# Altium PCB ABLS-PCB-R01.PcbDoc
Units mm, origin at the board's own origin, x right, y up, seen from the top; angles counter-clockwise.
Board outline 6 x 6 mm, 2 copper layers (Top Layer, Bottom Layer), stack 1.571 mm thick; 9 components, 4 nets, 22 pads, 11 vias.
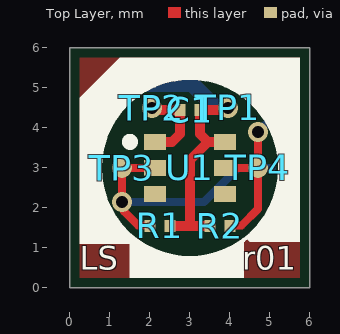
[diagram p0: Top Layer view]
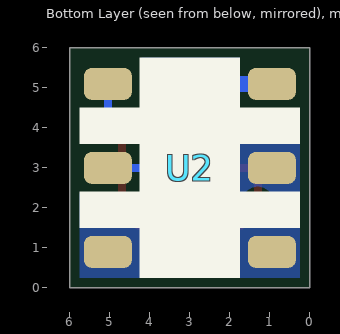
[diagram p1: Bottom Layer view, seen from below]
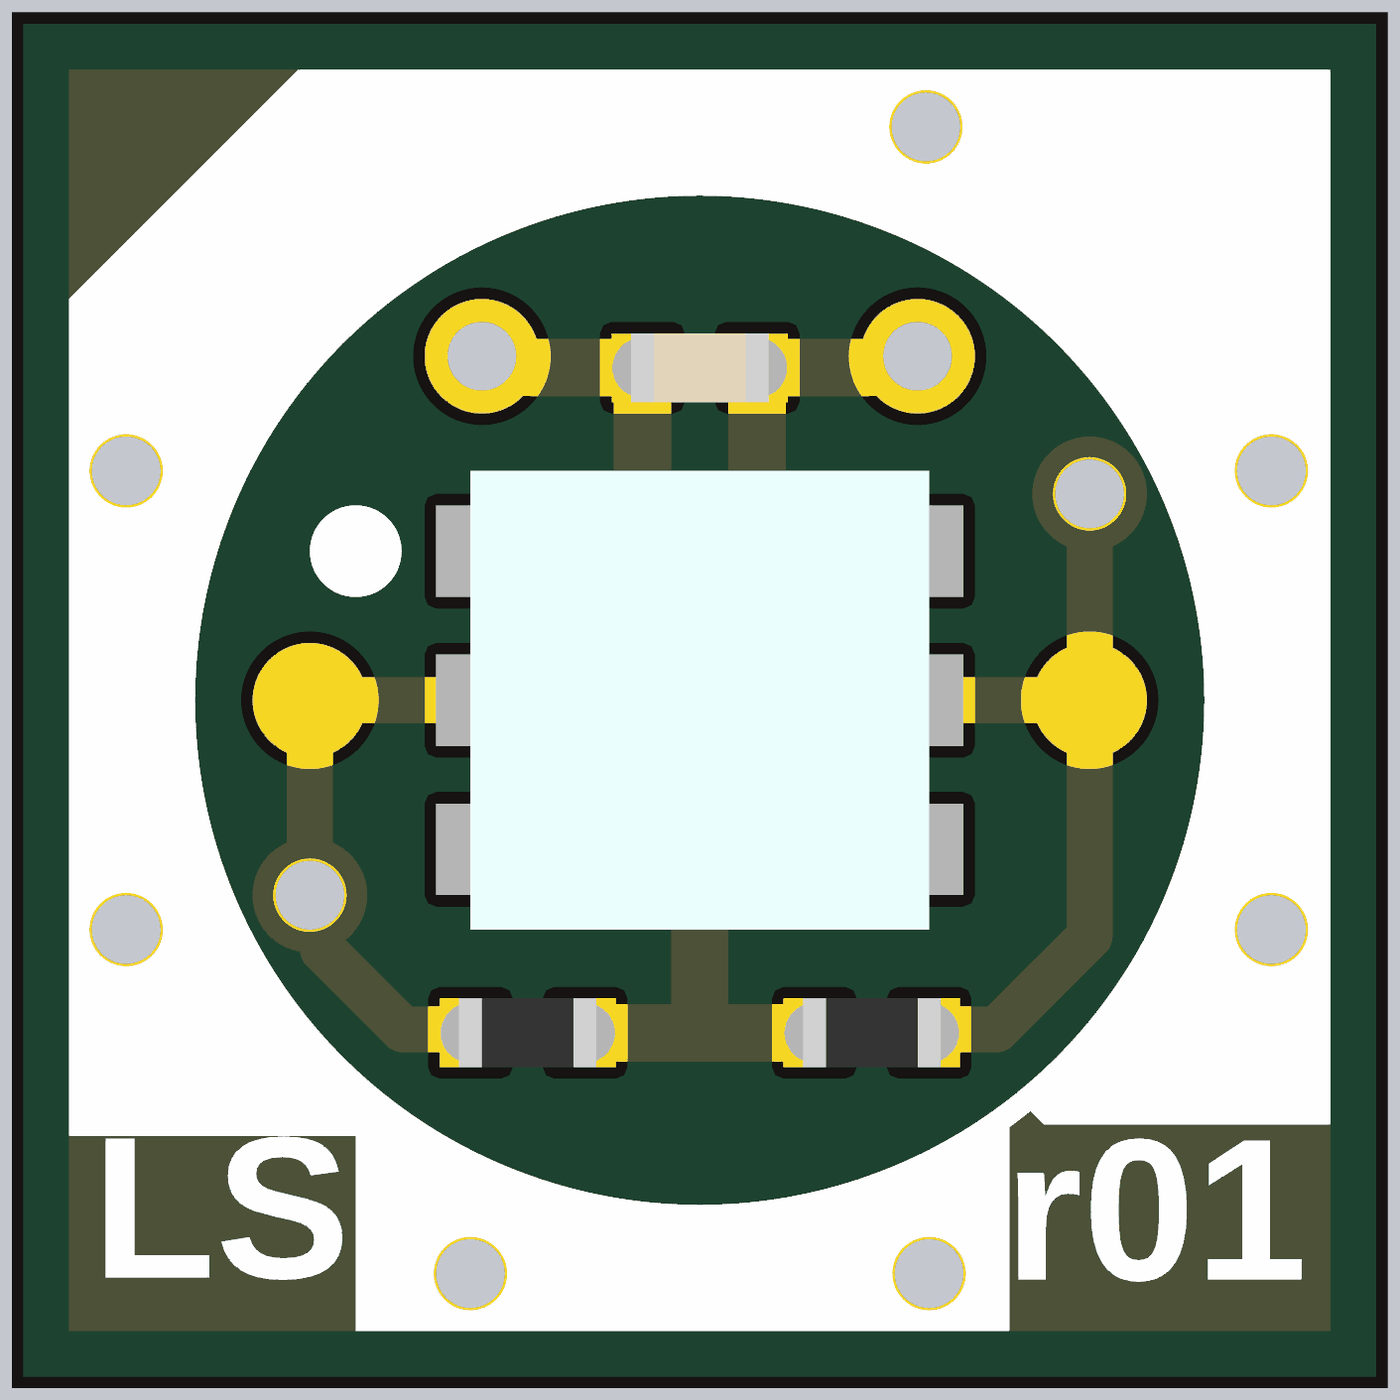
[diagram p2: 3D render of the assembled board from above, using the file's embedded part models]

## Layer stack, top to bottom
Top Solder: solder mask 0.0102, Solder Resist, Dk 3.5
Top Layer: signal copper 0.0356
Dielectric 1: dielectric 1.5, FR-4, Dk 4.8
Bottom Layer: signal copper 0.0356
Bottom Solder: solder mask 0.0102, Solder Resist, Dk 3.5

## Board outline
0,0 6,0 6,6 0,6

## Design rules (kind name [scope] priority, off if disabled: settings)
Clearance [All] p1: gap=0.13 ignorepadtopadclearanceinfootprint=FALSE
ComponentClearance ComponentClearance_TP [HasFootprint('TP_0.50mm')] p1: gap=0.1 collisioncheckmode=3 verticalgap=0.1 showdistances=FALSE
ComponentClearance [All] p2: gap=0.254 collisioncheckmode=3 verticalgap=0.254 showdistances=FALSE
PolygonConnect [All] p1: connectstyle=Direct reliefconductorwidth=0.254 reliefentries=4 polygonreliefangle="90 Angle" airgapwidth=0.254
RoomDefinition "Ambient Light Sensor" [InComponentClass('Ambient Light Sensor')] p1: confinementstyle=ConfineOut formatcopy=TRUE lockcomponents=FALSE outline 6.95,0.5 45.4,0.5 45.4,5.6 6.95,5.6
RoutingVias [All] p1: holewidth=0.3 width=0.5 viastyle="Through Hole" minholewidth=0.3 minwidth=0.5 maxholewidth=1 maxwidth=1.5
SilkToSilkClearance [All] p1: silktosilkclearance=0
SolderMaskExpansion [All] p1: expansion=0.05 istentingtop=FALSE
Width [All] p1: maxlimit=4 minlimit=0.1 preferedwidth=0.2
28 further rules are at their usual default settings.

## Classes and differential pairs
net class PWR: VCCA3.3

## Components (designator, comment, footprint, x,y, rotation, side; value= is the part's Value field where it differs from the comment)
C1 "470nF 10V" CAPC0603X03L 3,4.45 r180 top
R1 "2.1k 1%" RESC0603X03L 2.25,1.55 r0 top
R2 "2.1k 1%" RESC0603X03L 3.75,1.55 r180 top
TP1 "Testpoint 0.5mm" TP_0.50mm 3.95,4.5 r90 top
TP2 "Testpoint 0.5mm" TP_0.50mm 2.05,4.5 r90 top
TP3 "Testpoint 0.5mm" TP_0.50mm 1.3,3 r90 top
TP4 "Testpoint 0.5mm" TP_0.50mm 4.7,3 r90 top
U1 "VEML3235" "Light Sensor_VEML3235" 3,3 r0 top
U2 "Ambient Light Sensor Module" "ABLS-R01-sensor-Module Footprint" 3,3 r180 bottom

## Footprints (in the part's own frame and the unit in brackets; to place one, negate y for a bottom-side part, rotate by r counter-clockwise, add the part's x,y. Pads: shape width x height; smd on the part's side, far side on the other; paste and mask are expansions set on the pad)
"ABLS-R01-sensor-Module Footprint" [mm] "LGA Footprint for Solder On Ambient Light Sensor"
  rrect50% 1.2x0.8 smd: 1(2.05,2.1) 2(2.05,0) 3(2.05,-2.1) 4(-2.05,-2.1) 5(-2.05,0) 6(-2.05,2.1)
CAPC0603X03L [mm] "Chip Capacitor, 2-Leads, Body 0,60x0,30mm, IPC High Density"
  rect 0.27x0.3 smd paste-0.5: 1(-0.25,0) 2(0.25,0)
  body extent -0.3,-0.15 0.3,0.15, height 0.3
"Light Sensor_VEML3235" [mm] "Ambient light sensor VEML3235"
  rect 0.55x0.4 smd: 1(-0.875,0.65) 2(-0.875,0) 3(-0.875,-0.65) 4(0.875,-0.65) 5(0.875,0) 6(0.875,0.65)
  body extent -1,-1 1,1, height 0.87
RESC0603X03L [mm] "Chip Resistor, 2-Leads, Body 0,60x0,30mm, IPC High Density"
  rect 0.27x0.3 smd paste-0.5: 1(-0.25,0) 2(0.25,0)
  body extent -0.3,-0.15 0.3,0.15, height 0.26
TP_0.50mm [mm] "Testpoint 0.50mm diameter"
  round 0.5 smd paste-1: TP(0,0)

## Part data
C1: library part CAP_0201_470nF_10V, "Multilayer Ceramic Capacitors MLCC - SMD/SMT 0201 10VDC", Manufacturer 1="Taiyo Yuden", Manufacturer 1 Prt. Nr.=LMK063BBJ474KPLF, Manufacturer 2=TDK, Manufacturer 2 Prt. Nr.=C0603X5R1A474M030BC
R1 R2: library part RES_0201_2.1k_1%, "Thick Film Resistors - SMD 2.1K OHM 1%", Manufacturer 1=Panasonic, Manufacturer 1 Prt. Nr.=ERJ-1GNF2101C, Manufacturer 2=Yageo, Manufacturer 2 Prt. Nr.=RC0201FR-072K1L
U1: library part "Ambient Light Sensor_VEML3235", "Ambient Light Sensors Low Power, High Sensitivity, I2C Ambient Light Sensor", Manufacturer 1="Vishay Semiconductors", Manufacturer 1 Prt. Nr.=VEML3235
U2: library part ABLS-MOD-R01, "Custom PCB Ambient Light Sensor LGA Footprint"

## Via types
v1: diameter 0.5, hole 0.3, Top Layer to Bottom Layer, tented both sides, 11 vias

## Nets (pads, with @x,y where several pads share a name; then routed paths per layer and width w, separated by ;. In a path a pad name is that pad's centre, name@x,y a point inside that pad or via, vN(x,y) a via of type N, cw(c..) or ccw(c..) an arc to the next point about the centre after c; other vN are vias at no path point)
GND: C1.2 TP2.TP U1.1 U2.2 U2.3 U2.4 | length 2
  Top Layer w0.25: v1(2.05,4.5) 2.098,4.452 2.275,4.452 2.277,4.45 C1.2 2.75,3.85 2.55,3.65 U1.1
  other v1: 2,0.5 4,0.5 0.499,2 5.493,2 0.499,4 5.493,4 3.986,5.5
SCL: R2.1 TP4.TP U1.5 U2.6 | length 5
  Top Layer w0.2: U1.5 TP4.TP ; R2.1 4.015,1.565 4.295,1.565 4.7,1.97 TP4.TP ; v1(4.7,3.9) TP4.TP
  Bottom Layer w0.2: v1(4.7,3.9) 5.05,4.25 U2.6
SDA: R1.1 TP3.TP U1.2 U2.5 | length 6.8
  Top Layer w0.2: R1.1 1.985,1.565 1.705,1.565 1.357,1.913 1.357,2.093 v1(1.3,2.15) TP3.TP U1.2
  Bottom Layer w0.2: v1(1.3,2.15) 3.35,2.15 4.2,3 U2.5
VCCA3.3: C1.1 R1.2 R2.2 TP1.TP U1.6 U2.1 | length 8.6
  Top Layer w0.25: R1.2 3,1.55 ; R2.2 3,1.55 ; U1.6 3.45,3.65 ; v1(3.95,4.5) 3.902,4.452 3.725,4.452 3.723,4.45 C1.1 3.25,3.85 3.45,3.65 ; 3,1.55 3,3.2 3.45,3.65
  Bottom Layer w0.4: U2.1 3.05,5.1 3.631,4.519 3.931,4.519 v1(3.95,4.5)
pads on no net: U1.3 U1.4

## Polygon pours and split planes (outlines as drawn)
GND on Bottom Layer "GND_L02_P000" (solid, remove dead copper, pour order 0): 0.25,0.25 0.25,5.75 5.75,5.75 5.75,0.25
GND on Top Layer "GND_L01_P001" (solid, remove dead copper, pour order 1): 0.25,0.25 5.75,0.25 5.75,5.75 0.25,5.75

## Other copper
Top Layer:
  pour cut-out: 0.75,3 cw(c3,3) 3,5.25 cw(c3,3) 5.25,3 cw(c3,3) 3,0.75 cw(c3,3) 0.75,3
Bottom Layer:
  pour cut-out: 0.25,5.75 1.75,5.75 1.75,4.45 0.25,4.45
  pour cut-out: 5.75,5.75 5.75,2.35 4.2,2.35 4.2,5.75

## Silkscreen, mask and mechanical layers (free items; w line width, h text height)
Top Overlay:
  circle w0.2: c1.5,3.65 r0.1
  circle w0.1: c3,3 r2.25
  region: 0.25,4.75 1.25,5.75 5.75,5.75 5.75,1.15 4.5,1.15 4.4,1.25 4.614,1.464 ccw(c3.077,3) 5.25,3 ccw(c3,3) 3,5.25 ccw(c3,3) 0.75,3 ccw(c3,3) 3,0.75 3.143,0.75 ccw(c3.143,2.457) 4.35,1.25 4.35,0.25 1.5,0.25 1.5,1.1 0.25,1.1
  text "LS" at 0.25,0.25 h1
  text "r01" at 4.312,0.25 h1
Bottom Overlay:
  region: 1.75,0.25 1.75,1.5 0.25,1.5 0.25,2.4 1.75,2.4 1.75,3.6 0.25,3.6 0.25,4.5 1.75,4.5 1.75,5.75 4.25,5.75 4.25,4.5 5.75,4.5 5.75,3.6 4.25,3.6 4.25,2.4 5.75,2.4 5.75,1.5 4.25,1.5 4.25,0.25
Top Solder:
  the board outline again, w0.1
Mechanical 1:
  the board outline again, w0.05
Mechanical 29:
  text ".Designator" at 3.5,4.6 h0.3 r180
  text ".Designator" at 2.167,4.246 h0.25 r90
  text ".Designator" at 4.067,4.246 h0.25 r90
  text ".Designator" at 1.991,2.774 h0.5
  text ".Designator" at 1.417,2.746 h0.25 r90
  text ".Designator" at 4.817,2.746 h0.25 r90
  text ".Designator" at 4.25,1.7 h0.3 r180
  text ".Designator" at 1.75,1.4 h0.3